# Altium PCB xbowtie.PcbDoc (part 2 of 3)
Units mil, origin at the board's own origin, x right, y up, seen from the top; angles counter-clockwise.
Board outline 3822.83 x 3919.29 mil, 4 copper layers (Top Layer, GND, POWER, Bottom Layer), stack 53.912 mil thick; 127 components, 86 nets, 452 pads, 412 vias.
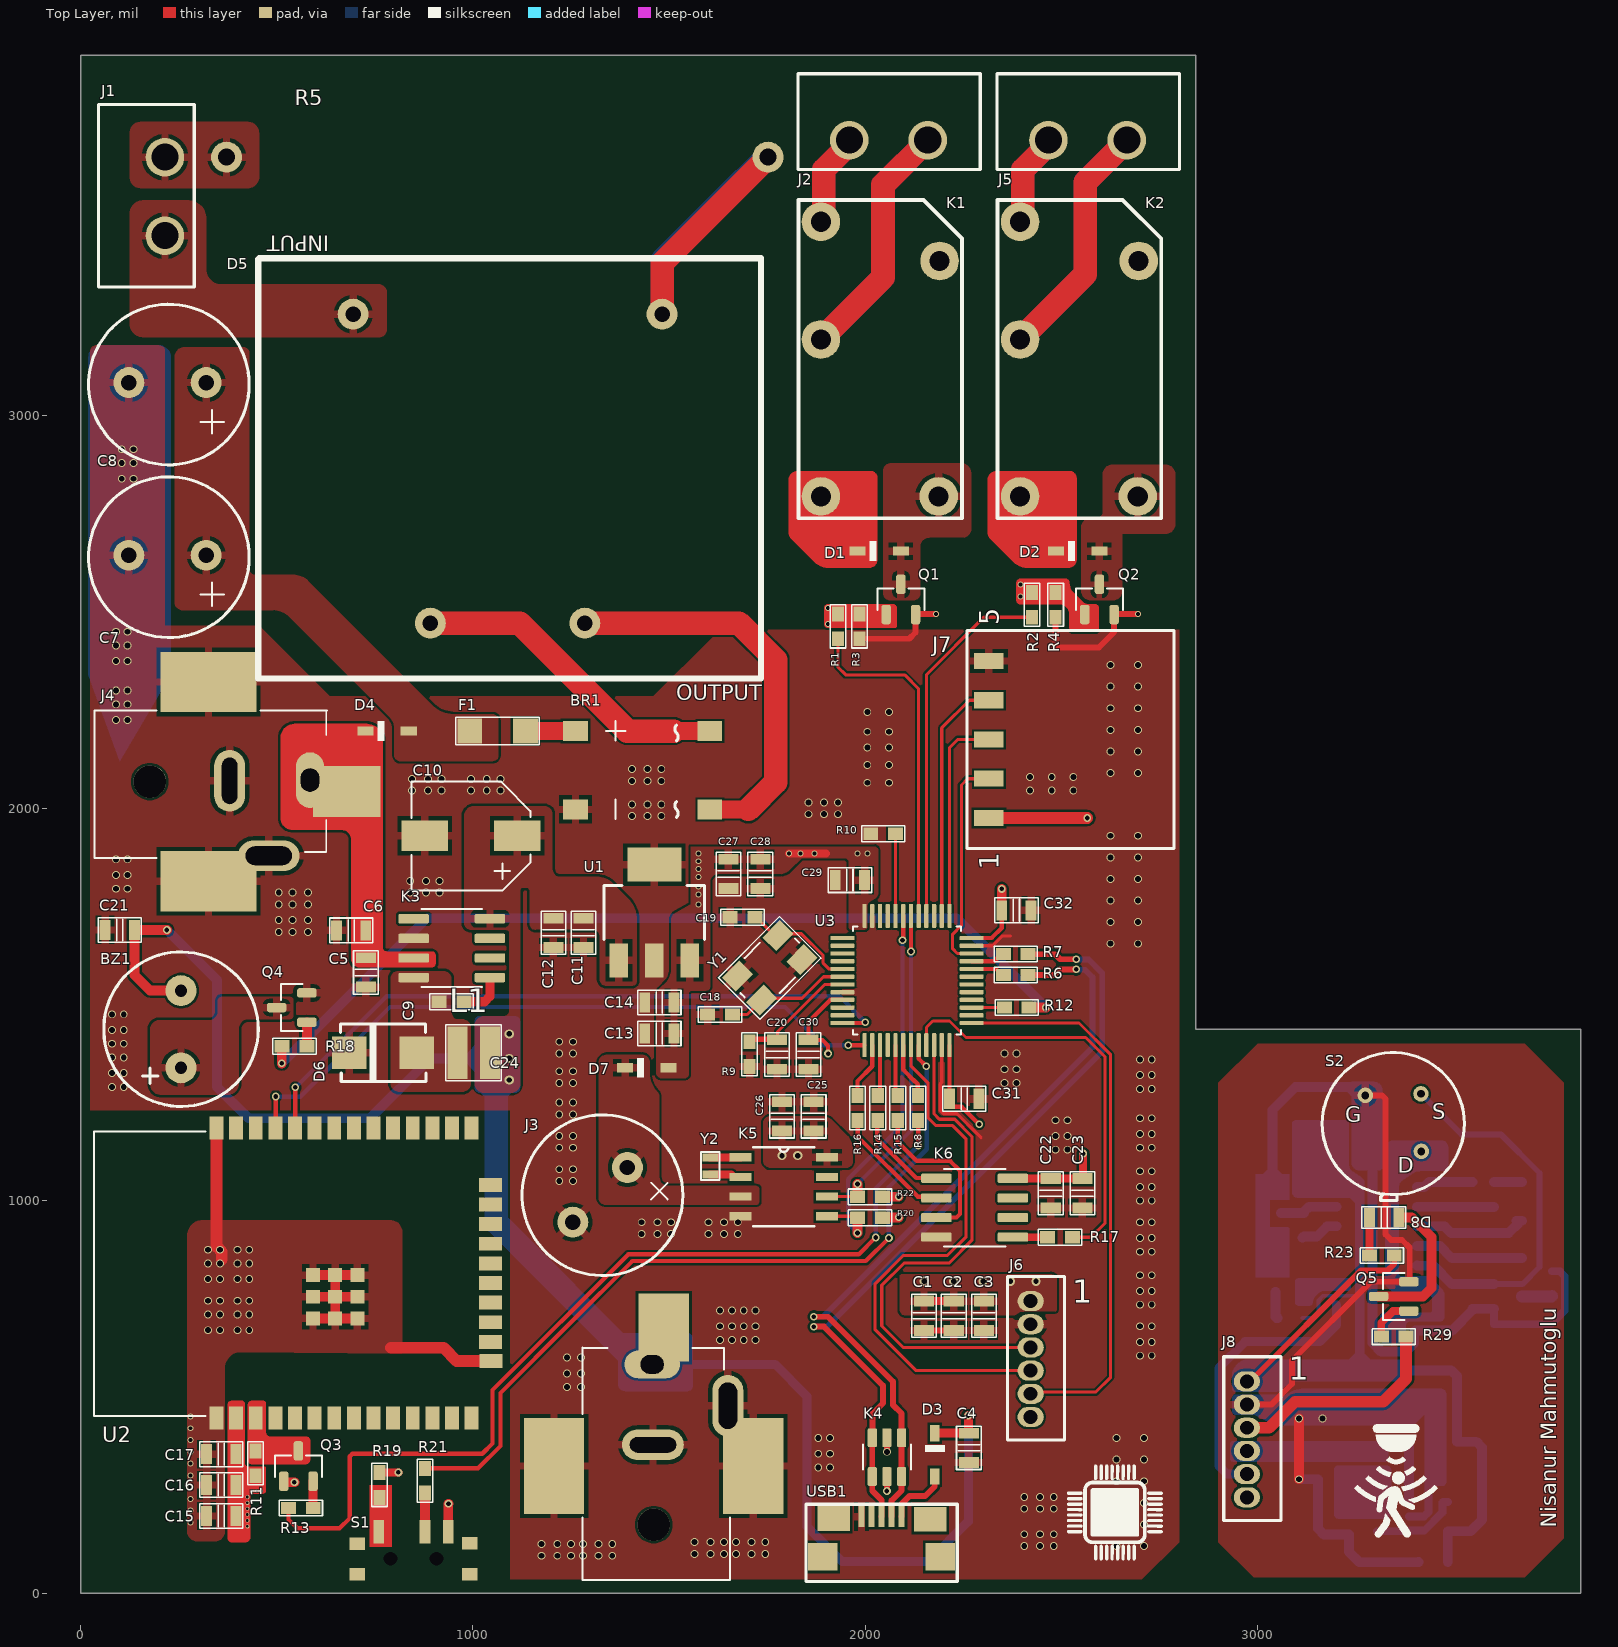
[diagram p0: Top Layer view]

## Part data (continued)
J7: "Samtec - SMH-105-02-L-S - Receptacle, 2.54MM, Tht, R/a, 5WAY", Flammability Rating="UL94 V-0", Manufacturer=Samtec, Manufacturer Part Number=SMH-105-02-L-S, Max Operating Temperature=125°C, Min Operating Temperature=-55°C, Supplier Part Number 1=SAM11813-ND, Insulation Color=Black, Category=Connectors, ComponentLink1Description=http://www.farnell.com/datasheets/1927708.pdf?_ga=2.237598468.569325269.1503285096-1413671594.1503025027&src-supplier=Farnell, ComponentLink1URL=http://www.farnell.com/datasheets/1927708.pdf?_ga=2.237598468.569325269.1503285096-1413671594.1503025027&src-supplier=Farnell, ComponentLink2Description=http://www.samtec.com/documents/webfiles/pdf/SMH.PDF?src-supplier=Newark, ComponentLink2URL=http://www.samtec.com/documents/webfiles/pdf/SMH.PDF?src-supplier=Newark, ComponentLink3Description=http://www.samtec.com/documents/webfiles/pdf/SMH.PDF?src-supplier=Avnet, ComponentLink3URL=http://www.samtec.com/documents/webfiles/pdf/SMH.PDF?src-supplier=Avnet, ComponentLink4Description=http://suddendocs.samtec.com/catalog_english/smh.pdf?src-supplier=Digikey, ComponentLink4URL=http://suddendocs.samtec.com/catalog_english/smh.pdf?src-supplier=Digikey, Connector Type=Receptacle, Contact Finish - Mating=GOLD, Contact Material=Bronze, Contact Plating=Gold, Contact Shape=Square, Contact Type=Forked, Fastening Type=Pull, Gender=Receptacle, Number of Contacts=5, Number of Positions=5, Number of Rows=1, Orientation=Horizontal, Packaging=Rail/Tube, Pitch=2.54mm, Pricing 1="1=2,18, 10=1,899, 100=1,6968, 500=1,414, 1000=1,212, 5000=1,07464 (USD)", Radiation Hardening=No, Reach SVHC Compliant=No, RoHS=Yes, RoHS Compliant=Yes, Series=SMH, Stock 1=38, Supplier 1=Digikey, Termination=Solder, Insulation Material=Polymer
K1 K2: "Electromechanical Relay 12VDC 360Ohm 10(NO)/3(NC)A SPDT (( 20mm 10mm 16mm)) THT Power Relay", Manufacturer=Panasonic, Supplier Part Number 1=255-3562-ND, Category="Power Relays", ComponentLink1Description=https://datasheet.ciiva.com/24388/307ds-61b20-en-lq-24388909.pdf?src-supplier=Onlinecomponents.com, ComponentLink1URL=https://datasheet.ciiva.com/24388/307ds-61b20-en-lq-24388909.pdf?src-supplier=Onlinecomponents.com, Manufacturer Part Number=ALQ112, Pricing 1="1=1,28, 10=1,204, 25=1,0704, 50=1,017, 100=0,9635, 250=0,85648, 500=0,80296, 1000=0,74942, 5000=0,72266 (USD)", RoHS=Yes, Stock 1=36095, Supplier 1=Digikey
K3: "SIMPLE SWITCHER® 6.5V to 40V, 1A Low Component Count Step-Down Regulator 8-SOIC -40 to 125", Case/Package="SOIC N", Manufacturer="TI National Semiconductor", Max Operating Temperature=125°C, Max Output Current=1A, Max Input Voltage=40V, Min Operating Temperature=-40°C, Min Input Voltage=8V, Output Voltage=12V, Package Quantity=2500, Quiescent Current=2.5mA, Supplier Part Number 1=296-35410-1-ND, Switching Frequency=260kHz, Category="Voltage Regulators - Switching", ComponentLink1Description=https://datasheet.ciiva.com/41457/001013881-da-01-en-ic-reg-buck-lm2675mx-12-nopb-soic-8-tid-41457896.pdf?src-supplier=Conrad, ComponentLink1URL=https://datasheet.ciiva.com/41457/001013881-da-01-en-ic-reg-buck-lm2675mx-12-nopb-soic-8-tid-41457896.pdf?src-supplier=Conrad, ComponentLink2Description=https://datasheet.ciiva.com/3220/lm2675-3220840.pdf?src-supplier=Avnet, ComponentLink2URL=https://datasheet.ciiva.com/3220/lm2675-3220840.pdf?src-supplier=Avnet, Efficiency=94%, Lead Free="Lead Free", Manufacturer Part Number=LM2675MX-12/NOPB, Mount="Surface Mount", Number of Outputs=1, Number of Pins=8, Operating Supply Voltage=40V, Output Current=1A, Output Type=Fixed, Packaging="Tape and Reel", Pricing 1="1=4,71, 10=4,231, 25=3,9996, 100=3,4663, 250=3,28856, 500=2,95082, 1000=2,48864 (USD)", Radiation Hardening=No, RoHS=Yes, RoHS Compliant=Yes, Series=LM2675, Stock 1=811, Supplier 1=Digikey
K5: "Real-time Clocks Clock/Calendar I2C, 2-Wire Serial 70uA @ 2V ~ 5.5V SOIC-8_150mil RoHS", Manufacturer=STMicroelectronics, Supplier Part Number 1=497-4697-1-ND, Category="Real Time Clocks", ComponentLink1Description=https://datasheet.ciiva.com/7630/1837112-7630077.pdf?src-supplier=Element14, ComponentLink1URL=https://datasheet.ciiva.com/7630/1837112-7630077.pdf?src-supplier=Element14, ComponentLink2Description=https://datasheet.ciiva.com/16213/cd00001542-16213654.pdf?src-supplier=Future+Electronics, ComponentLink2URL=https://datasheet.ciiva.com/16213/cd00001542-16213654.pdf?src-supplier=Future+Electronics, ComponentLink3Description=https://datasheet.ciiva.com/41459/001185345-da-01-en-ic-rtc-srl-512kbit-m41t00m6f-soic-8-stm-41459818.pdf?src-supplier=Conrad, ComponentLink3URL=https://datasheet.ciiva.com/41459/001185345-da-01-en-ic-rtc-srl-512kbit-m41t00m6f-soic-8-stm-41459818.pdf?src-supplier=Conrad, Manufacturer Part Number=M41T00M6F, Pricing 1="1=3,77, 10=3,388, 25=3,2032, 100=2,776, 250=2,63364, 500=2,36316, 1000=1,99303 (USD)", RoHS=Yes, Stock 1=6434, Supplier 1=Digikey
K6: "Temp Sensor Digital Serial (3-Wire, SPI) 8-Pin SOIC N Tube", Manufacturer=Maxim, Manufacturer Part Number=MAX6662MSA+, Supplier Part Number 1=MAX6662MSA+-ND, Category="Temperature and Humidity Sensors", ComponentLink1Description=https://datasheet.ciiva.com/5299/max6662-89142-5299456.pdf?src-supplier=Mouser, ComponentLink1URL=https://datasheet.ciiva.com/5299/max6662-89142-5299456.pdf?src-supplier=Mouser, ComponentLink2Description=https://datasheet.ciiva.com/3277/max6662-3277979.pdf?src-supplier=Avnet, ComponentLink2URL=https://datasheet.ciiva.com/3277/max6662-3277979.pdf?src-supplier=Avnet, ComponentLink3Description=https://datasheet.ciiva.com/2003/max6662-2003390.pdf?src-supplier=Digikey, ComponentLink3URL=https://datasheet.ciiva.com/2003/max6662-2003390.pdf?src-supplier=Digikey, Pricing 1="1=4,61, 10=3,454, 25=3,0704, 50=2,9168, 100=2,8401, 500=2,37956, 1000=2,22604 (USD)", RoHS=Yes, Stock 1=718, Supplier 1=Digikey
L1: library part "IND 47 uH", "Power Inductor, Aec-Q200, 47Uh, 0.39A Rohs Compliant: Yes", Case Code (Metric)=3030, Case Code (Imperial)=1212, Current Rating=390mA, DC Resistance (DCR)=2.3R, Manufacturer="Wurth Electronics", Max Operating Temperature=125°C, Min Operating Temperature=-40°C, Ratings=AEC-Q200, Saturation Current=1.18A, Self Resonant Frequency=8MHz, Supplier Part Number 1=732-6947-6-ND, Test Frequency=100kHz, Tolerance=30%, Inductance=47uH, Case/Package=1212, Category="Fixed Inductors", ComponentLink1Description=https://media.digikey.com/pdf/Data%20Sheets/Wurth%20Electronics%20PDFs/Q+_Products_Flyer.pdf?src-supplier=Digikey, ComponentLink1URL=https://media.digikey.com/pdf/Data%20Sheets/Wurth%20Electronics%20PDFs/Q+_Products_Flyer.pdf?src-supplier=Digikey, Core Material=Ferrite, Height - Seated (Max)=0.059inch, Length=0.118inch, Manufacturer Part Number=78438335470, Mount="Surface Mount", Packaging="Cut Tape", Pricing 1="1=2,11, 50=1,97, 250=1,803, 500=1,672 (USD)", RoHS=Yes, RoHS Compliant=Yes, Series=WE-MAIA, Shielding=Shielded, Stock 1=14725, Supplier 1=Digikey, Width=0.118inch
Q1 Q2 Q3 Q4 Q5: "Transistor General Purpose BJT NPN 40 Volt 0.2A Automotive 3-Pin SOT-23", Case/Package=SOT-23, Collector Base Voltage (VCBO)=60V, Collector Emitter Breakdown Voltage=40V, Collector Emitter Saturation Voltage=300mV, Continuous Collector Current=200mA, Emitter Base Voltage (VEBO)=6V, Frequency=300MHz, Manufacturer="Diodes Zetex", Max Operating Temperature=150°C, Max Power Dissipation=300mW, Min Operating Temperature=-55°C, Package Quantity=3000, Power Dissipation=350mW, Supplier Part Number 1=MMBT3904-FDICT-ND, Category=BJTs, Collector Emitter Voltage (VCEO)=40V, Collector-emitter Voltage-Max=300mV, ComponentLink1Description=https://datasheet.ciiva.com/11201/ds30036-11201778.pdf?src-supplier=Avnet, ComponentLink1URL=https://datasheet.ciiva.com/11201/ds30036-11201778.pdf?src-supplier=Avnet, ComponentLink2Description=https://datasheet.ciiva.com/15138/getdatasheetpartid-53265-15138780.pdf?src-supplier=Verical, ComponentLink2URL=https://datasheet.ciiva.com/15138/getdatasheetpartid-53265-15138780.pdf?src-supplier=Verical, ComponentLink3Description=https://datasheet.ciiva.com/22711/1915516-22711750.pdf?src-supplier=Element14, ComponentLink3URL=https://datasheet.ciiva.com/22711/1915516-22711750.pdf?src-supplier=Element14, ComponentLink4Description=https://datasheet.ciiva.com/11198/ds30036-11198999.pdf?src-supplier=Avnet, ComponentLink4URL=https://datasheet.ciiva.com/11198/ds30036-11198999.pdf?src-supplier=Avnet, ComponentLink5Description=https://datasheet.ciiva.com/6361/ds30036-6361256.pdf?src-supplier=Digikey, ComponentLink5URL=https://datasheet.ciiva.com/6361/ds30036-6361256.pdf?src-supplier=Digikey, ComponentLink6Description=https://datasheet.ciiva.com/6361/ds30036-6361254.pdf?src-supplier=Digikey, ComponentLink6URL=https://datasheet.ciiva.com/6361/ds30036-6361254.pdf?src-supplier=Digikey, Gain Bandwidth Product=300MHz, Height=1mm, hFE Min=100, Lead Free="Lead Free", Length=3.05mm, Manufacturer Part Number=MMBT3904-7-F, Max Breakdown Voltage=40V, Max Collector Current=200mA, Max Frequency=300MHz, Mount="Surface Mount", Number of Elements=1, Number of Pins=3, Packaging="Tape and Reel", Polarity=NPN, Pricing 1="1=0,12, 10=0,086, 100=0,0467, 500=0,03666, 1000=0,02545 (USD)", Radiation Hardening=No, Reach SVHC Compliant=No, RoHS=Yes, RoHS Compliant=Yes, Series="Automotive, AEC-Q101", Stock 1=5031738, Supplier 1=Digikey, Transition Frequency=300MHz, Voltage Rating (DC)=40V, Weight=0.000282oz, Width=1.4mm
R1 R2 R11 R26 R29 R31: library part "RES 1K OHM 0603"
R3 R4 R28 R33 R37: library part "RES 10K OHM 0603", "Res Thin Film 0603 10K Ohm 0.1% 1/10W ±25ppm/°C Molded SMD SMD Punched Carrier T/R", Case Code (Metric)=1608, Case Code (Imperial)=0603, Manufacturer=Panasonic, Manufacturer Part Number=ERA-3AEB103V, Max Operating Temperature=155°C, Max Power Dissipation=100mW, Min Operating Temperature=-55°C, Package Quantity=5000, Ratings=AEC-Q200, Resistance=10kR, Resistance Tolerance=0.1%, Resistor Type="Thin Film,Metal Film", Supplier Part Number 1=P10KDBCT-ND, Temperature Coefficient=25ppm/°C, Voltage Rating=75V, Case/Package=0603, Category="Chip SMD Resistors", Construction=Rectangular, Contact Plating=Tin, Depth=0.8mm, Features="Automotive AEC-Q200", Height=0.45mm, Lead Free=5697LeadFree, Length=1.6mm, Military Standard=Not, Mount="Surface Mount", Number of Pins=2, Number of Terminations=2, Packaging="Tape and Reel", Power Rating=100mW, Pricing 1="1=0,13, 10=0,098, 50=0,0778, 100=0,0697, 500=0,05308, 1000=0,04691 (USD)", Radiation Hardening=No, Reach SVHC Compliant=No, RoHS=Yes, RoHS Compliant=Yes, Series=ERA-3A, Size Code=0603, Stock 1=16550, Supplier 1=Digikey, Technology="METAL FILM", Termination=SMD/SMT, Tolerance=0.1%, Voltage Rating (DC)=75V, Width=0.8mm
R6 R7: library part "RES 15 OHM 0603"
R8 R9 R10 R12 R13 R14 R15 R16 R17 R18 R19 R21 R23: library part "RES 100 OHM 0603"
R20 R22: library part "RES 4K7 OHM 0603"
R24: "Thermistor PTC 10K Ohm 1% 2-Pin 1206 Surface Mount Solder Pad T/R Automotive", Case Code (Imperial)=1206, Manufacturer="Vishay Dale", Max Operating Temperature=125°C, Max Power Dissipation=125mW, Min Operating Temperature=-55°C, Package Quantity=5000, Resistance=10kR, Resistance Tolerance=1%, Supplier Part Number 1=541-3533-1-ND, Voltage=40V, Case/Package=1206, Category="Linear ICs", ComponentLink1Description=https://datasheet.ciiva.com/2852/tfpt-2852076.pdf?src-supplier=Digikey, ComponentLink1URL=https://datasheet.ciiva.com/2852/tfpt-2852076.pdf?src-supplier=Digikey, Height=0.55mm, Lead Free="Lead Free", Length=3.2mm, Manufacturer Part Number=TFPT1206L1002FM, Mount="Surface Mount", Packaging="Tape and Reel", Power Rating=125mW, Pricing 1="1=1,32, 10=0,992, 25=0,7936, 100=0,7274, 500=0,61166, 1000=0,54554 (USD)", RoHS=Yes, RoHS Compliant=Yes, Series=TFPT, Stock 1=9270, Supplier 1=Digikey, Termination=SMD/SMT, Tolerance=1%, Width=1.6mm
R25 R27 R32: library part "RES 220K OHM 0603"
R30 R34: library part "RES 560K OHM 0603"
R35 R36: library part "RES 0 OHM 0603", "Zero Ohm Resistor, Jumper, 0603 [1608 Metric], Thick Film, 100 mW, 1 A, Surface Mount", Case Code (Metric)=1608, Case Code (Imperial)=0603, Manufacturer=Yageo, Manufacturer Part Number=RC0603JR-070RL, Max Operating Temperature=155°C, Max Power Dissipation=100mW, Min Operating Temperature=-55°C, Package Quantity=5000, Resistance=0mR, Resistance Tolerance=5%, Resistor Type="Thick Film", Supplier Part Number 1=311-0.0GRCT-ND, Temperature Coefficient=200ppm/°C, Tolerance=1%, Voltage Rating=50V, Case/Package=0603, Category="Chip SMD Resistors", Construction=Rectangular, Contact Plating=Tin,Matte, Depth=0.8mm, Features="Moisture Resistant", Height=0.45mm, Lead Free=5697LeadFree, Length=1.6mm, Military Standard=Not, Number of Pins=2, Number of Terminations=2, Packaging="Tape and Reel", Power Rating=100mW, Pricing 1="1=0,1, 10=0,015, 25=0,0112, 50=0,0086, 100=0,006, 250=0,0048, 500=0,00386, 1000=0,00284 (USD)", Reach SVHC Compliant=Unknown, RoHS=Yes, RoHS Compliant=Yes, Series=RC, Size Code=0603, Stock 1=255925, Supplier 1=Digikey, Technology="THICK FILM", Termination=SMD/SMT, Voltage Rating (DC)=50V, Width=0.8mm
R38: library part "RES 43K OHM 0603"
S1: "Slide Switch, SPDT, 0.025A, 24V, SMD", Manufacturer=E-Switch, Max Operating Temperature=70°C, Min Operating Temperature=-20°C, Operating Force=150gf, Supplier Part Number 1=EG5720CT-ND, Voltage Rating (DC)=24V, Actuator Length=1.4mm, Actuator Type=Standard, ComponentLink1Description=https://media.digikey.com/pdf/Data%20Sheets/E-Switch%20PDFs/EG1215_Series_Ds.pdf?src-supplier=Digikey, ComponentLink1URL=https://media.digikey.com/pdf/Data%20Sheets/E-Switch%20PDFs/EG1215_Series_Ds.pdf?src-supplier=Digikey, ComponentLink2Description=http://www.farnell.com/datasheets/2645007.pdf?src-supplier=Farnell, ComponentLink2URL=http://www.farnell.com/datasheets/2645007.pdf?src-supplier=Farnell, Electrical Life=10000Cycles, Manufacturer Part Number=EG1215AA, Mechanical Life=10000Cycles, Mount="Surface Mount", Packaging="Cut Tape", Pricing 1="1=0,99, 10=0,951, 25=0,8884, 100=0,7715, 250=0,702, 500=0,6508, 1000=0,60327 (USD)", RoHS=Yes, RoHS Compliant=Yes, Series=EG, Stock 1=14311, Supplier 1=Digikey, Switch Function=On-On, Switch Travel=1.5mm, Termination="Gull Wing", Throw Configuration=SPDT
S2: "Sensor Pyro Detector Dual Motion", Manufacturer=Excelitas, Manufacturer Part Number=LHI878/3902, Supplier Part Number 1=1601-LHI878/3902-ND, Category=Uncategorized, RoHS=No, Supplier 1=Digikey
U1: "AP7361 Series 3.3 V 1 A Low SMT Dropout Fixed-Mode Regulator - SOT-223", Case/Package=SOT-223, Dropout Voltage=500mV, Manufacturer=Diodes, Max Operating Temperature=85°C, Max Output Current=1A, Max Power Dissipation=1.1W, Max Input Voltage=6V, Min Current Limit=1.1A, Min Operating Temperature=-40°C, Min Input Voltage=2.2V, Output Voltage=3.3V, Package Quantity=1, Power Dissipation=1.1kW, Power Supply Rejection Ratio (PSRR)=65dB, Quiescent Current=70uA, Reference Voltage=800mV, Supplier Part Number 1=AP7361-33E-13DICT-ND, Accuracy=1%, Category="Voltage Regulators - Linear", ComponentLink1Description=https://datasheet.ciiva.com/26926/getdatasheetpartid-670786-26926141.pdf?src-supplier=Verical, ComponentLink1URL=https://datasheet.ciiva.com/26926/getdatasheetpartid-670786-26926141.pdf?src-supplier=Verical, ComponentLink2Description=https://datasheet.ciiva.com/29568/ap7361-29568378.pdf?src-supplier=Digikey, ComponentLink2URL=https://datasheet.ciiva.com/29568/ap7361-29568378.pdf?src-supplier=Digikey, Contact Plating=Tin,Matte, Lead Free="Lead Free", Manufacturer Part Number=AP7361-33E-13, Mount="Surface Mount", Number of Outputs=1, Number of Pins=4, Number of Regulators=1, Output Current=1A, Output Type=Fixed, Packaging="Tape and Reel", Polarity=Positive, Pricing 1="1=0,51, 10=0,414, 25=0,3788, 100=0,2818, 250=0,2554, 500=0,21138, 1000=0,15853 (USD)", Radiation Hardening=No, Reach SVHC Compliant=Yes, RoHS=Yes, RoHS Compliant=Yes, Series=-, Stock 1=124979, Supplier 1=Digikey, Weight=0.000282oz
U3: "MCU 32-bit STM32F ARM Cortex M3 RISC 32KB Flash 2.5V/3.3V 48-Pin LQFP Tray", Case/Package=LQFP, Manufacturer=STMicroelectronics, Max Frequency=72MHz, Max Operating Temperature=85°C, Max Supply Voltage=3.6V, Min Operating Temperature=-40°C, Min Supply Voltage=2V, Package Quantity=1500, Supplier Part Number 1=497-11515-ND, Category=Microcontrollers, ComponentLink1Description=https://datasheet.ciiva.com/15122/getdatasheetpartid-69879-15122075.pdf?src-supplier=Verical, ComponentLink1URL=https://datasheet.ciiva.com/15122/getdatasheetpartid-69879-15122075.pdf?src-supplier=Verical, ComponentLink2Description=https://datasheet.ciiva.com/14100/pustm-arm-microcont-stm32f103-en-14100507.pdf?src-supplier=Distrelec, ComponentLink2URL=https://datasheet.ciiva.com/14100/pustm-arm-microcont-stm32f103-en-14100507.pdf?src-supplier=Distrelec, Core Architecture=ARM, Data Bus Width=32b, Height=1.4mm, Lead Free="Lead Free", Length=7mm, Manufacturer Part Number=STM32F103C6T6A, Memory Size=32KB, Memory Type=FLASH, Number of ADC Channels=10, Number of Pins=48, Number of Timers/Counters=3, Number of I/Os=37, Packaging=Tray, Pricing 1="1=6,07, 10=5,453, 25=5,1552, 80=4,46775, 250=4,23868, 500=3,80336, 1000=3,20766, 2500=3,04728 (USD)", RAM Size=10KB, RoHS=Yes, RoHS Compliant=Yes, Series=STM32F103C6, Stock 1=1596, Supplier 1=Digikey, Weight=0.006409oz, Width=7mm, Interface=I2C,SPI,USART
USB1: library part "MİCRO B USB Connector", "CONN USB MICRO B RECPT SMT R/A", Color=Black, Current Rating=1.8A, Flammability Rating="UL94 V-0", Manufacturer="Amphenol ICC / FCI", Max Operating Temperature=85°C, Max Voltage Rating (AC)=100V, Min Operating Temperature=-55°C, Package Quantity=1400, Supplier Part Number 1=609-4613-1-ND, Insulation Resistance=1GR, Category=Uncategorized, Connector Type=USB,Receptacle, Contact Material="Copper Alloy", Contact Plating=Gold, Depth=5.57mm, Features=Shielded, Gender=Receptacle, Housing Material=Polymer, Length=7.86mm, Manufacturer Part Number=10118192-0001LF, Mount="Surface Mount,Horizontal", Number of Contacts=5, Number of Pins=5, Number of Ports=1, Orientation="Right Angle", Packaging="Tape and Reel", Pitch=0.65mm, Pricing 1="1=0,46, 10=0,404, 25=0,3696, 50=0,3478, 100=0,3334, 250=0,30436, 500=0,28988 (USD)", Radiation Hardening=No, Reach SVHC Compliant=No, RoHS=No, Series=-, Stock 1=75394, Supplier 1=Digikey, Termination=Solder, USB Standard="USB 2.0", Voltage Rating=100V
Y2: library part "CRYSTAL 32768kHz", "CRYSTAL 32.768kHz ±20ppm Crystal 12.5pF 90 kOhm -40°C ^ 85°C Surface Mount 2-SMD", Case/Package=CSMD, ESR (Equivalent Series Resistance)=90kR, Frequency=32.768kHz, Frequency Tolerance=20ppm, Load Capacitance=12.5pF, Manufacturer=Abracon, Manufacturer Part Number=ABS05-32.768KHZ-T, Max Operating Temperature=85°C, Min Operating Temperature=-40°C, Operating Frequency="32.768 kHz", Package Quantity=3000, Supplier Part Number 1=535-11899-1-ND, Category=Crystals, ComponentLink1Description=https://datasheet.ciiva.com/23810/abs05-23810480.pdf?src-supplier=Newark, ComponentLink1URL=https://datasheet.ciiva.com/23810/abs05-23810480.pdf?src-supplier=Newark, ComponentLink2Description=https://datasheet.ciiva.com/6728/abs05-6728949.pdf?src-supplier=Digikey, ComponentLink2URL=https://datasheet.ciiva.com/6728/abs05-6728949.pdf?src-supplier=Digikey, ComponentLink3Description=https://datasheet.ciiva.com/6728/abs05-6728950.pdf?src-supplier=Digikey, ComponentLink3URL=https://datasheet.ciiva.com/6728/abs05-6728950.pdf?src-supplier=Digikey, ComponentLink4Description=https://datasheet.ciiva.com/16411/abs05-16411149.pdf?src-supplier=Future+Electronics, ComponentLink4URL=https://datasheet.ciiva.com/16411/abs05-16411149.pdf?src-supplier=Future+Electronics, Depth=1mm, Height=0.5mm, Lead Free="Lead Free", Length=1.6mm, Mount="Surface Mount", Number of Pins=2, Packaging="Tape and Reel", Pricing 1="1=0,75, 10=0,628, 50=0,565, 100=0,5022, 500=0,4771, 1000=0,40177 (USD)", Radiation Hardening=No, Reach SVHC Compliant=No, RoHS=Yes, RoHS Compliant=Yes, Series=ABS05, Series Resistance=90kR, Stock 1=140496, Supplier 1=Digikey, Termination=SMD/SMT, Tolerance=20ppm, Width=1mm

## Via types
v1: diameter 20, hole 15, Top Layer to Bottom Layer, tented both sides, 304 vias
v2: diameter 19.68, hole 11.81, Top Layer to Bottom Layer, tented both sides, 29 vias
v3: diameter 15, hole 10, Top Layer to Bottom Layer, tented both sides, 28 vias
v4: diameter 19.68, hole 11.81, Top Layer to GND, tented both sides, 18 vias
v5: diameter 19.68, hole 11.81, GND to Bottom Layer, tented both sides, 13 vias
v6: diameter 23.62, hole 13.78, Top Layer to Bottom Layer, tented both sides, 10 vias
v7: diameter 10, hole 7, Top Layer to Bottom Layer, tented both sides, 9 vias
v8: diameter 19.68, hole 11.81, Top Layer to Bottom Layer, tented top, 1 vias

## Nets (pads, with @x,y where several pads share a name; then routed paths per layer and width w, separated by ;. In a path a pad name is that pad's centre, name@x,y a point inside that pad or via, vN(x,y) a via of type N, cw(c..) or ccw(c..) an arc to the next point about the centre after c; other vN are vias at no path point)
3V3DC: C1.2 C2.2 C3.2 C13.2 C14.2 C15.2 C16.2 C17.2 C22.2 C23.2 C25.2 C26.2 C27.2 C28.2 C29.2 C30.2 C31.2 C32.2 D7.2 J6.1 J7.1 K4.5 K5.8 K6.8 R11.1 R19.2 R20.2 R22.2 U1.3 U2.2 U3.9 U3.24 U3.36 U3.48 | length 1497.1
  Top Layer w11: v4(1905,1374.91) 1905,1395 1890.65,1409.35 1855.65,1409.35 C30.2@1855,1410 1855,1456.26 1910.54,1511.8 U3.9@1941.73,1511.81 ; U3.24@2214.57,1396.46 C31.2@2214.57,1259.72 2214.57,1247.91 2222.85,1239.63 2245.37,1239.63 v4(2290,1195) ; U3.36@2270.87,1669.29 2321.8,1669.29 2347.6,1695.09 C32.2@2347.6,1740
  Top Layer w15: v4(2055,260) 2055.06,260.06 2055.06,296.99 K4.5@2055.12,297.05
  Top Layer w20: R19.2@761.81,307.09 809.59,307.09 v2(810,307.5) ; v3(1805,1885) v3(1835,1885) v3(1870,1885) 1900,1885 ; C1.2@2149.61,744.09 C2.2@2225.39,744.09 ; K6.8@2376.38,1056.69 2472.05,1056.69 C22.2@2472.44,1056.3 C23.2@2553.15,1056.3 2555,1058.15 v4(2555,1120)
  Top Layer w25: R20.2@2043.32,956.69 2044.12,957.5 v5(2085,957.5) ; R22.2@2043.32,1009.84 2043.47,1010 v2(2085,1010) ; C32.2@2347.6,1740 v8(2347.6,1794.61)
  Top Layer w30: J7.1@2314.85,1975.41 v2(2565.41,1975.41)
  other v2: 2055,260 2085,957.5 2555,1120 2290,1195 1905,1374.91
  other v3: 1575,1755 1575,1780 1575,1800 1575,1825 1575,1845 1575,1865 1575,1885 1980,1885 2005,1885
  other v5: 810,307.5 2085,1010 2347.6,1794.61 2565.41,1975.41
  other v6: 2150,795 2225,795 2300,795 2370,795 2435,795 1787.5,1115 1827.5,1115
  other v7: 425,170 425,185 425,200 425,215 425,230 425,245 437.5,260 450,260 460,260
3V3DC_S: C33.2 C36.2 C37.2 C38.2 C40.1@3200.79,1102.36 C41.2 J8.1 K7.5 K8.14 R23.2 R24.2 R31.2 R32.2 | length 1973.7
  Top Layer w15: J8.1@2972.44,539.37 2980.31,539.37 3263.44,822.5 3331.61,822.5 3348,838.89 R23.2@3348,860 R23.2@3340.39,852.39
  Bottom Layer w10: R31.2@3114.18,700.79 3143.29,700.79 3154.89,712.39 3154.89,746.05 3166.49,757.65 3260,757.65
  Bottom Layer w25: 3259.53,1022.5 3260,1022.03 3260,757.65 3260,567.5 ; C36.2@3318.54,559.92 3330.35,559.92 3337.93,567.5 3493.23,567.5 3507.87,552.86 R24.2@3507.87,385.83 3557.03,385.83 3571.67,371.18 3571.67,186.67 3542.48,157.48 K7.5@3484.65,157.48 3484.45,157.28 3484.45,78.94 C33.2@3484.25,78.74
5VDC: BZ1.2 C4.2 C10.1 C11.2 C12.2 C21.2 D3.1 J3.1A J3.1B K3.4 L1.2 U1.1 | length 4254.3
  Top Layer w23: D3.1@2177.17,407.48 C4.2@2263.78,407.48 2262.5,408.76 v4(2262.5,452.5)
  Top Layer w25: v2(220,1690) C21.2@137.4,1690 137.4,1575.1 177.07,1535.43 BZ1.2@255.91,1535.43
  Bottom Layer w23: J3.1B@1456.69,582.68 1769.82,582.68 1851.25,501.25 1851.25,170 1941.25,80 2160,80 2262.5,182.5 v4(2262.5,452.5)
  Bottom Layer w25: v2(220,1690) 347.5,1562.5 347.5,1290 427.5,1210 737.5,1210 890,1362.5 1065,1362.5
  Bottom Layer w55: 1065,1362.5 v6(1092.5,1362.5)
  Bottom Layer w60: v6@1084,1362.5 1059.75,1338.25 1059.75,944.19 1421.26,582.68 J3.1B@1456.69,582.68
  other v4: 220,1690
  other v5: 2262.5,452.5
  other v6: 1092.5,1307.5 1092.5,1425
12VDC: C5.2 C6.2 D1.1 D2.1 D4.1 J4.1A J4.1B K1.5 K2.5 K3.7
AC_LINE_1: J1.1 R5.1 | length 0.1
  Top Layer w60: J1.1@215,3659.29 J1.1@215.08,3659.37
AC_LINE_2: D5.5 J1.2 | length 7.9
  Top Layer w60: J1.2@215,3459.29 219.13,3459.29 220.47,3460.63 J1.2@221.81,3459.29
BUZZER: R12.2 R18.1 | length 2282
  Top Layer w25: v4(512.5,1350) 512.5,1392.43 R18.1@513.77,1393.7 ; R12.2@2417.33,1492.13 2459.63,1492.13 v5(2460,1492.5)
  Bottom Layer w25: v4(512.5,1350) 882.5,1720 2232.5,1720 v5(2460,1492.5)
  other v2: 512.5,1350 2460,1492.5
GND: BR1.4 C1.1 C2.1 C3.1 C4.1 C5.1 C6.1 C7.2 C8.2 C10.2 C11.1 C12.1 C13.1 C14.1 C15.1 C16.1 C17.1 C18.1@1598.04,1474.41 C19.1@1655.5,1722.44 C20.2 C21.1 C22.1 C23.1 C24.2 C25.1 C26.1 C27.1 C28.1 C29.1 C30.1 C31.1 C32.1 D6.1 J3.2A J3.2B J3.3A J3.3B J4.2A J4.2B J4.3A J4.3B J6.2 J7.5 K3.6 K4.2 K5.4 K6.4 Q1.E Q2.E Q3.B Q4.E R3.1 R4.1 R9.1 R10.1 S1.3 U1. U1.2 U2.1 U2.15 U2.38 U2.39 U2.40 U2.41 U2.42 U2.43 U2.44 U2.45 U2.46 U2.47 U3.8 U3.23 U3.35 U3.47 USB1.5 Y1.2 Y1.4 | length 2277.6
  Top Layer w8: U3.23@2194.88,1396.46 2194.88,1301.92 2190.79,1297.82 2190.79,1229.99 2199.28,1221.5 2233.5,1221.5 2295,1160 ; U3.35@2270.87,1649.61 2324.03,1649.61 2349.42,1675 2370,1675
  Top Layer w15: R3.1@1985,2432 2112,2432 2127.95,2447.95 Q1.E@2127.95,2493.7 2129.25,2495 v3(2180,2495) ; v1(2055,360) 2055,395.75 K4.2@2055.12,395.87 ; C1.1@2149.61,669.29 C2.1@2225.39,669.29 ; R4.1@2485,2487 2485,2410 2595,2410 2633.86,2448.86 Q2.E@2633.86,2493.7 2635.16,2495 v3(2695,2495)
  Top Layer w25: Q3.B@517.72,285.04 517.72,282.99 518.21,282.5 v4(545,282.5) ; U2.45@592.4,700 U2.39@648.82,700 ; U2.46@592.4,755.12 U2.40@648.82,755.12 ; U2.47@592.4,810.24 U2.41@648.82,810.24 ; U2.42@705.25,699.75 705.13,699.87 648.94,699.87 U2.39@648.82,700 ; U2.43@705.24,755.12 U2.40@648.82,755.12 ; U2.44@705.24,810.24 U2.41@648.82,810.24 ; S1.3@937.03,156.4 937.03,227.03 v4(937.5,227.5) ; U2.39@648.82,700 U2.40@648.82,755.12 ; U2.40@648.82,755.12 U2.41@648.82,810.24
  Top Layer w30: U2.38@346.46,1185.04 346.46,883.54 360,870 360,850 ; 791.45,625 925,625 958.66,591.34 U2.15@1045.67,591.34
  other v1: 1175,95 1215,95 1250,95 1280,95 1320,95 1355,95 1565,100 1605,100 1640,100 1670,100 1710,100 1745,100 2405,120 2445,120 2480,120 2640,120 2710,120 1175,125 1215,125 1250,125 1280,125 1320,125 1355,125 1565,130 1605,130 1640,130 1670,130 1710,130 1745,130 2405,150 2445,150 2480,150 2640,175 2710,175 2405,215 2445,215 2480,215 2640,230 2710,230 2405,245 2445,245 2480,245 2640,285 2710,285 1880,320 1910,320 2640,340 2710,340 1880,355 1910,355 1880,395 1910,395 2640,395 2710,395 1240,525 1275,525 1240,560 1275,560 1240,600 1275,600 2700,605 2730,605 2700,640 2730,640 1630,645 1660,645 1690,645 1720,645 325,670 355,670 400,670 430,670 1630,680 1660,680 1690,680 1720,680 2700,680 2730,680 325,710 355,710 400,710 430,710 1630,720 1660,720 1690,720 1720,720 2700,735 2730,735 325,745 355,745 400,745 430,745 2700,770 2730,770 325,800 355,800 400,800 430,800 2700,810 2730,810 325,840 355,840 400,840 430,840 2700,870 2730,870 325,875 355,875 400,875 430,875 2700,905 2730,905 1430,915 1470,915 1505,915 1600,915 1640,915 1675,915 1430,945 1470,945 1505,945 1600,945 1640,945 1675,945 2700,945 2730,945 2700,1000 2730,1000 2700,1035 2730,1035 1220,1050 1255,1050 2700,1075 2730,1075 1220,1080 1255,1080 2485,1130 2515,1130 1220,1135 1255,1135 2700,1135 2730,1135 1220,1165 1255,1165 2485,1165 2515,1165 2700,1170 2730,1170 2485,1205 2515,1205 2700,1210 2730,1210 1220,1220 1255,1220 1220,1250 1255,1250 2700,1285 2730,1285 80,1290 110,1290 1220,1300 1255,1300 2355,1300 2385,1300 2700,1320 2730,1320 80,1325 110,1325 1220,1330 1255,1330 2355,1335 2385,1335 2700,1360 2730,1360 80,1365 110,1365 1220,1375 1255,1375 2355,1375 2385,1375 80,1400 110,1400 1220,1405 1255,1405 80,1435 110,1435 80,1475 110,1475 2625,1655 2695,1655 505,1685 540,1685 580,1685 2625,1710 2695,1710 505,1715 540,1715 580,1715 505,1755 540,1755 580,1755 2625,1765 2695,1765 505,1785 540,1785 580,1785 840,1785 880,1785 915,1785 90,1795 120,1795 840,1815 880,1815 915,1815 2625,1820 2695,1820 90,1830 120,1830 90,1870 120,1870 2625,1875 2695,1875 2625,1930 2695,1930 1405,1980 1445,1980 1480,1980 1855,1985 1895,1985 1930,1985 1405,2010 1445,2010 1480,2010 1855,2015 1895,2015 1930,2015 845,2045 885,2045 920,2045 995,2045 1035,2045 1070,2045 2420,2045 2475,2045 2530,2045 2005,2065 2060,2065 1405,2070 1445,2070 1480,2070 845,2075 885,2075 920,2075 995,2075 1035,2075 1070,2075 2420,2080 2475,2080 2530,2080 2625,2090 2695,2090 1405,2100 1445,2100 1480,2100 2005,2110 2060,2110 2625,2145 2695,2145 2005,2155 2060,2155 2005,2195 2060,2195 2625,2200 2695,2200 90,2225 120,2225 2005,2245 2060,2245 2625,2255 2695,2255 90,2265 120,2265 90,2300 120,2300 2625,2310 2695,2310 2625,2365 2695,2365 90,2375 120,2375 90,2415 120,2415 90,2450 120,2450 105,2840 135,2840 105,2880 135,2880 105,2915 135,2915
  other v2: 937.5,227.5 545,282.5
  other v3: 280,180 280,210 280,240 280,270 280,300 280,330 280,360 280,390 280,420 280,450